# EAGLE board ATtiny10 (EAGLE 6.5.0)
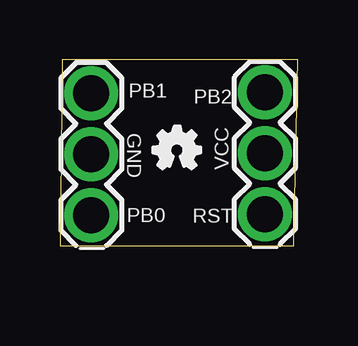
[diagram p0: board, top side]
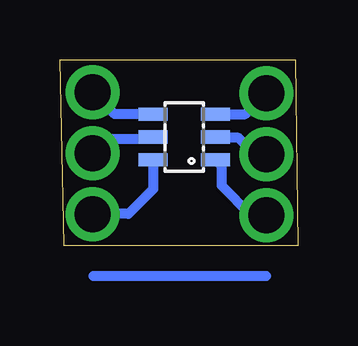
[diagram p1: board, bottom side, seen from below]

Size 9.92 x 7.73 mm. Coordinates in mm from the lower left corner, seen from the top.
Outline: 0,0 9.75,0 9.92,7.73 0.09,7.73 0,0
Copper layers (1*16): Top 0.035mm / dielectric 1.5mm / Bottom 0.035mm
Design rules "default": minimum track width 10mil, minimum drill 24mil, track to track 8mil, track to pad 8mil, pad to pad 8mil, via to via 8mil, smd to smd 8mil, copper to edge 40mil, drill to drill 8mil, minimum pad ring 10mil, minimum via ring 8mil, stop-mask expansion 4mil, vias tented up to drill 0mil, thermal gap 10mil

## Footprints (pad centres in the part's own frame; a part is rotated, then mirrored left to right if it is on the bottom)
SOT23-6 = smd 0.55 x 1.2: 1 -0.95,-1.3; 2 0,-1.3; 3 0.95,-1.3; 4 0.95,1.3; 5 0,1.3; 6 -0.95,1.3
1X3_SHORT_ROUND = drill 1.5 pad 2.2: 1 1.27,-1.52; 2 3.81,-1.52; 3 6.35,-1.52

## Placement (x,y rotation side)
IC1  ATTINY10  [SOT23-6]  4.73,4.52 90 bottom
U$1  1X3_SHORT_ROUND  [1X3_SHORT_ROUND]  2.83,7.62 270 top
U$2  1X3_SHORT_ROUND  [1X3_SHORT_ROUND]  10.07,7.66 270 top
U$3  [OSHW_FILLX70_NOTEXT]  3.89,3.2 0 top

## Library data of the parts
IC1 = adafruit
U$1 U$2 = Random parts(01-14-14)
U$3 = ohw-logo

## Nets
GND: IC1.2 U$1.2
PB0: IC1.1 U$1.3
PB1: IC1.3 U$1.1
PB2: IC1.4 U$2.1
RST: IC1.6 U$2.3
VCC: IC1.5 U$2.2

## Tracks (layer width: path | path; a pad name or v marks a point on that pad's centre or on a via)
GND
  Bottom 0.406: U$1.2 1.79,3.81 2.47,4.49 3.4,4.49 IC1.2
N$7
  Bottom 0.406: 1.31,-1.27 8.52,-1.27
PB0
  Bottom 0.406: U$1.3 1.94,1.27 3.17,2.5 3.17,3.31 IC1.1
PB1
  Bottom 0.406: IC1.3 2.19,5.47 U$1.1
PB2
  Bottom 0.406: IC1.4 7.63,5.47 U$2.1
RST
  Bottom 0.406: IC1.6 6.03,2.35 7.06,1.32 8.54,1.32 U$2.3
VCC
  Bottom 0.406: U$2.2 8.34,3.85 7.76,4.44 6.11,4.44 IC1.5

## Text on the board
_tsilk: PB1 | PB2 | GND | VCC | PB0 | RST